# Altium PCB Circuit_Labs_4Layer-85 X 80mm.PcbDoc
Units mil, origin at the board's own origin, x right, y up, seen from the top; angles counter-clockwise.
Board outline 3346.46 x 3149.61 mil, 4 copper layers (Top Layer, Internal Plane 1, Internal Plane 2, Bottom Layer), stack 70.17 mil thick; 124 components, 89 nets, 356 pads, 83 vias.
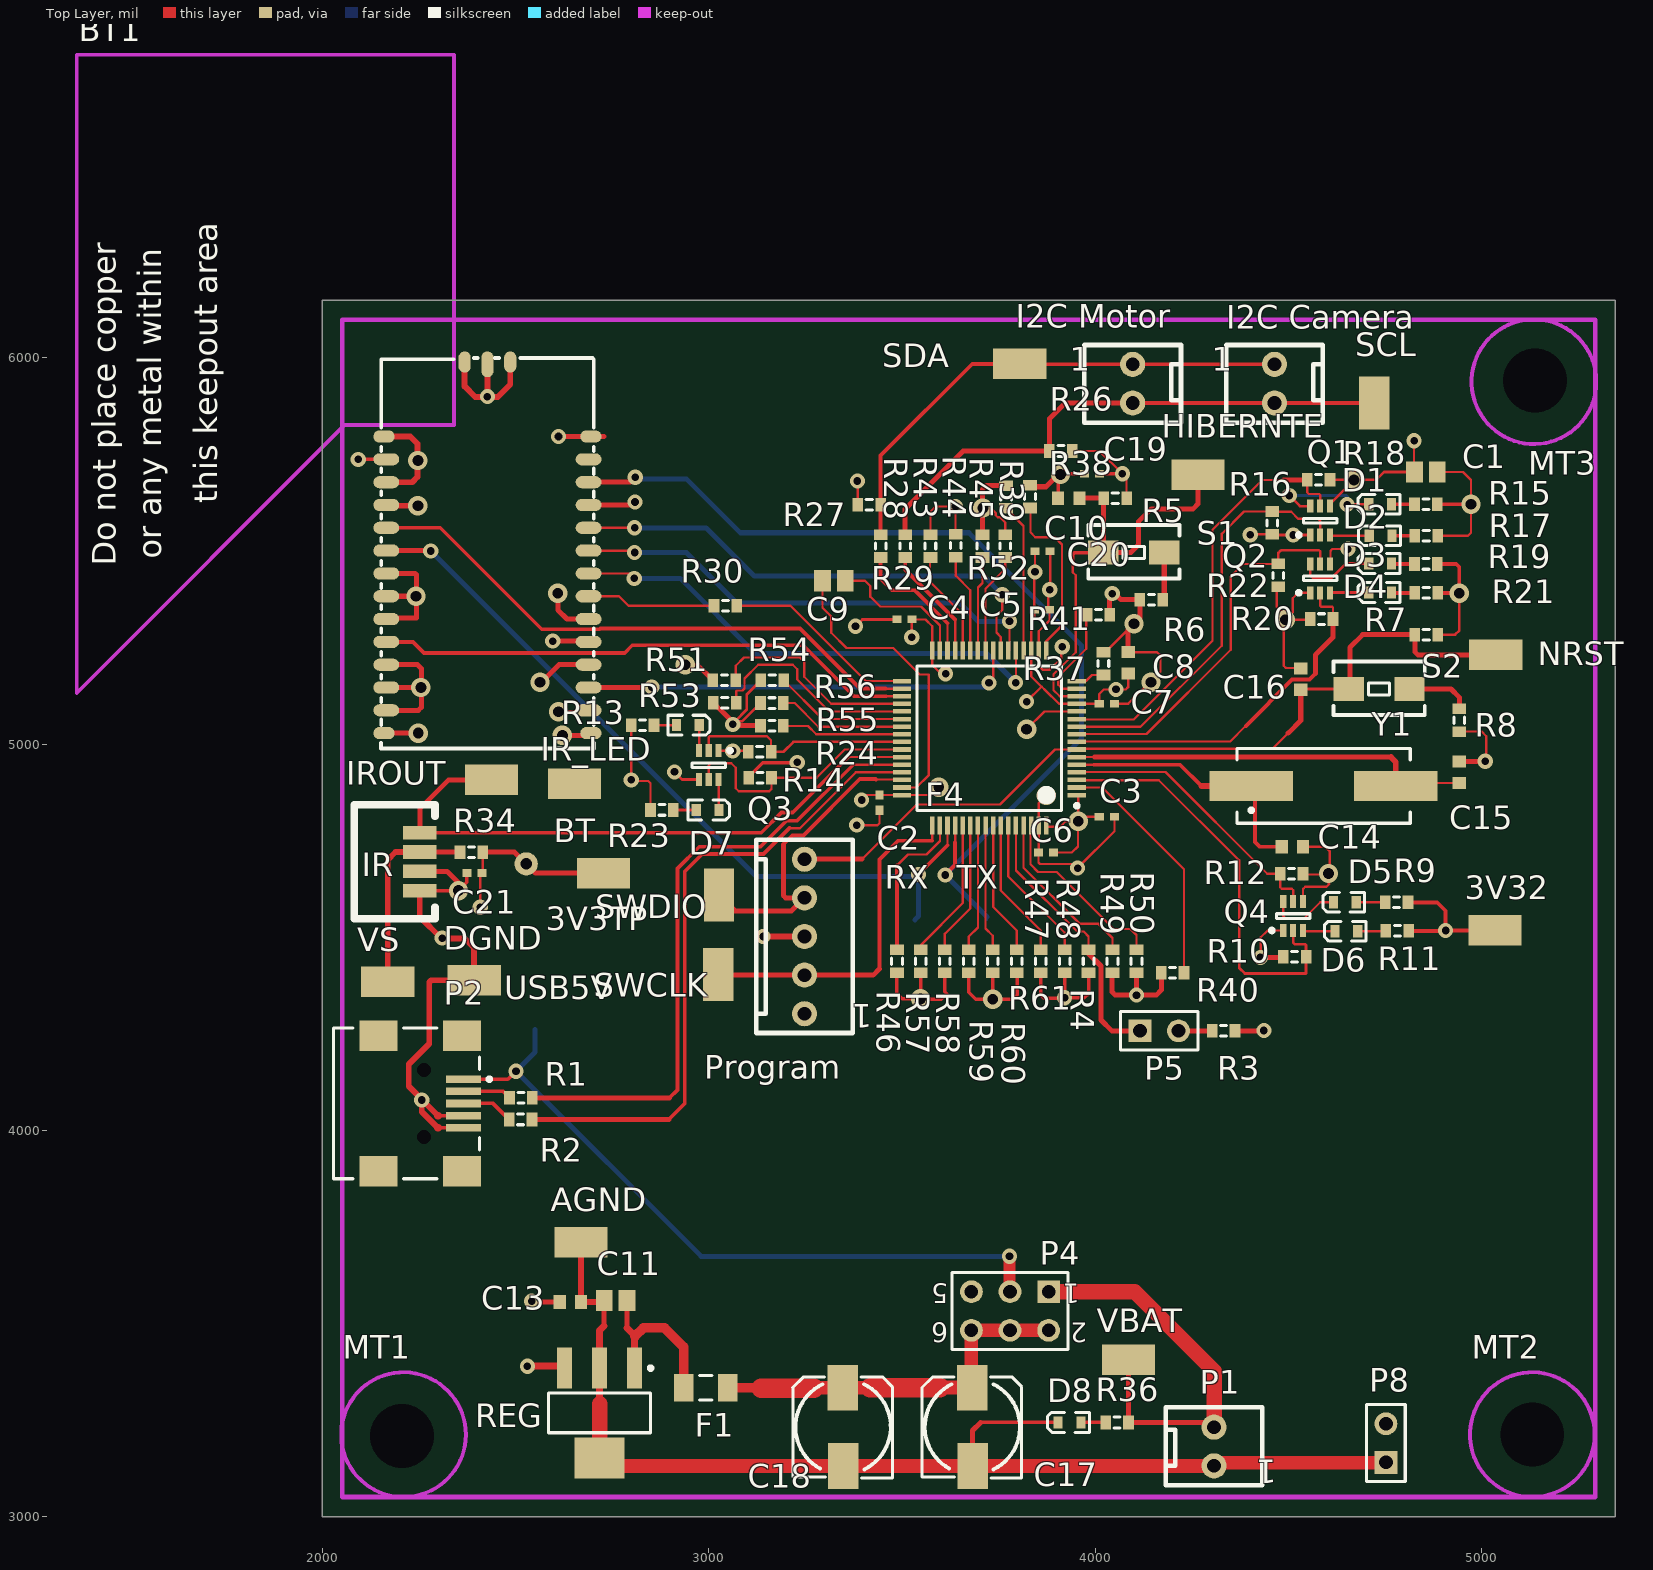
[diagram p0: Top Layer view]
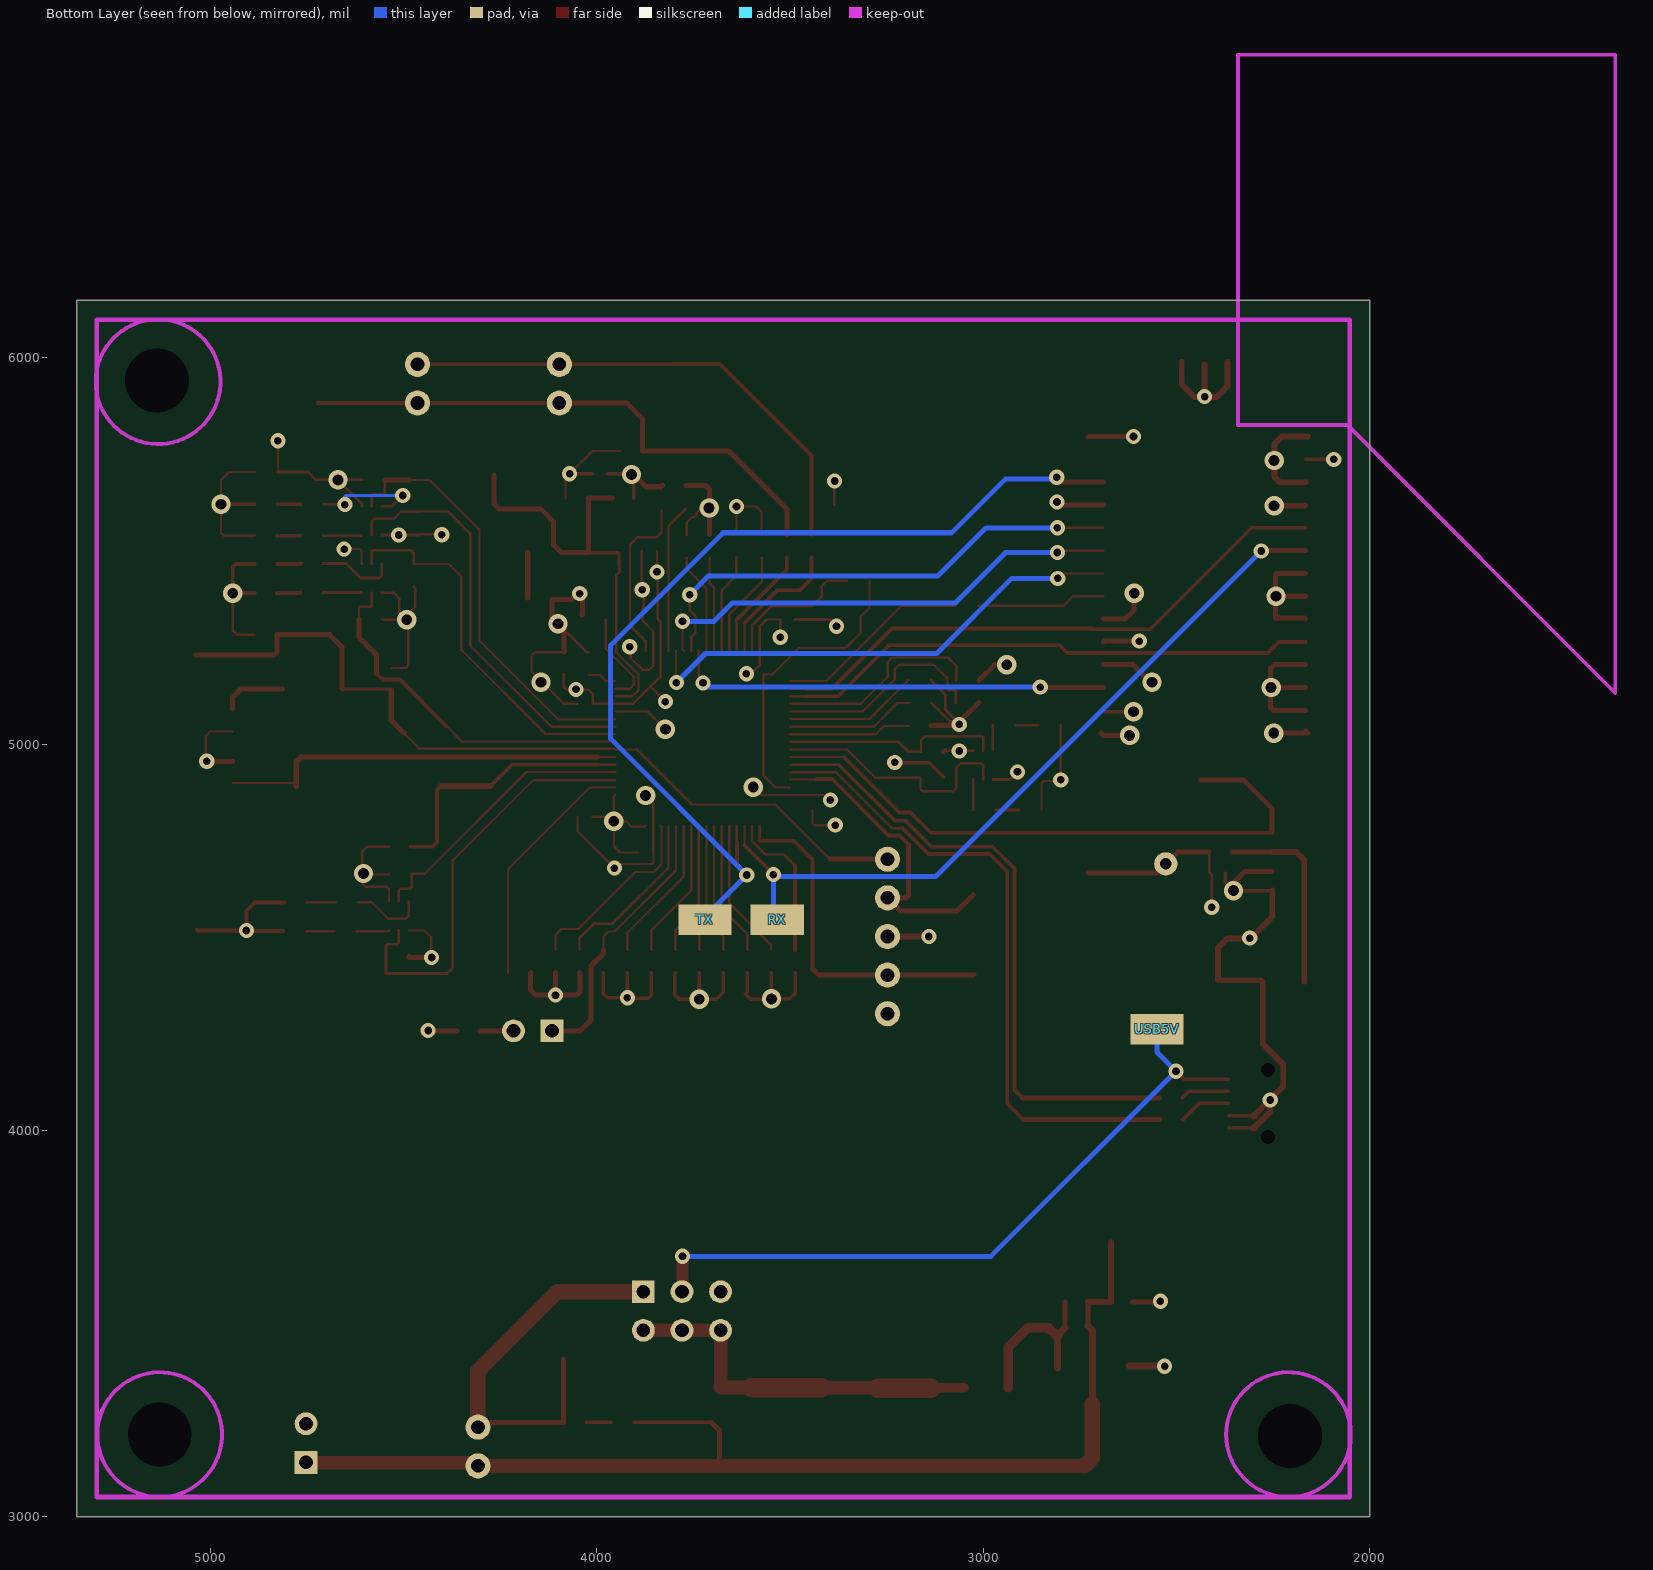
[diagram p1: Bottom Layer view, seen from below]
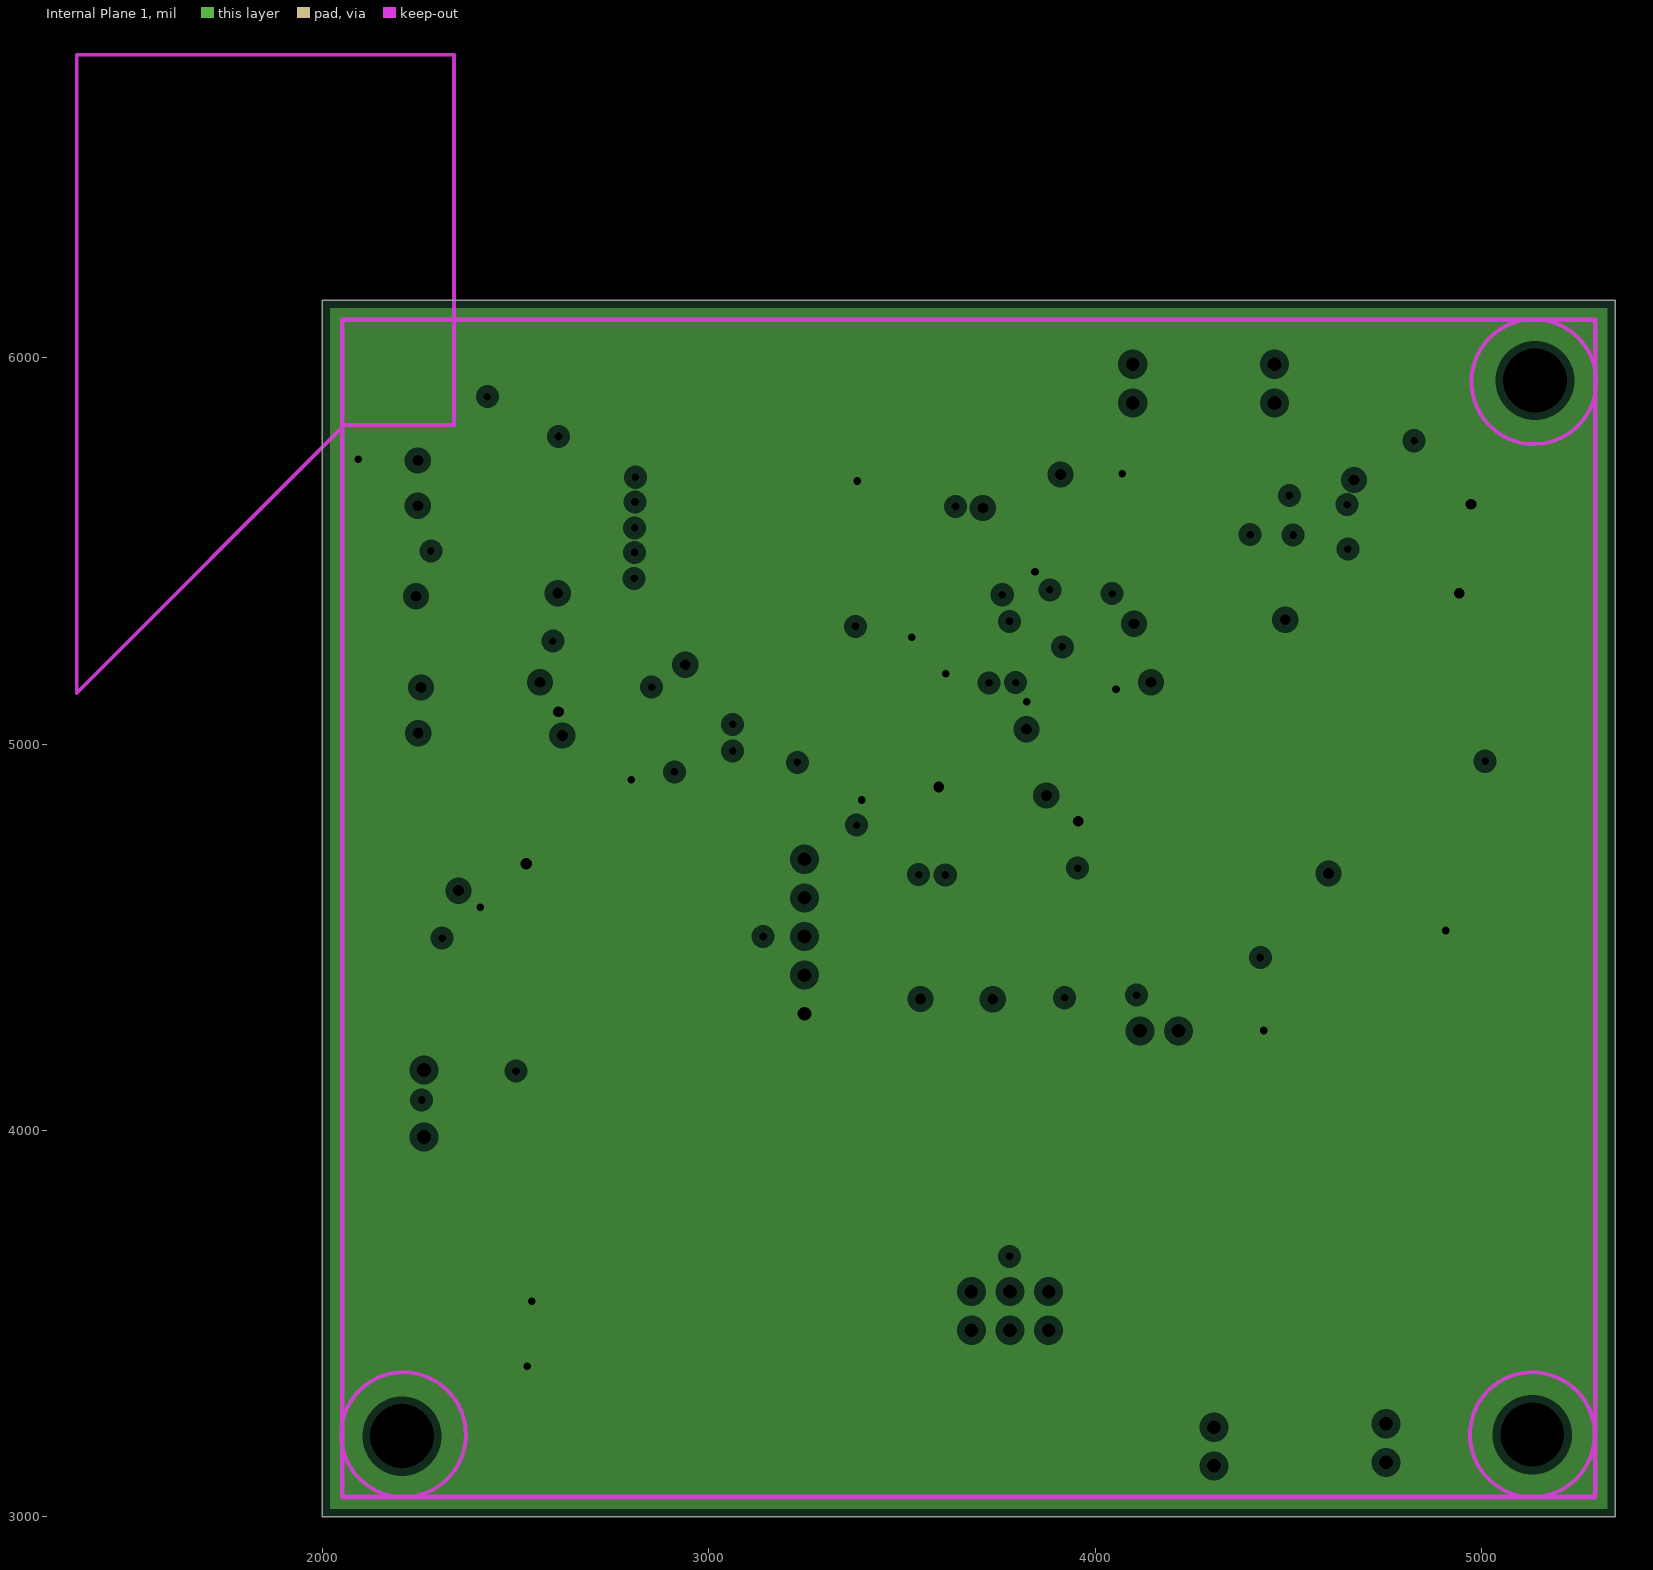
[diagram p2: Internal Plane 1, clearances drawn from the general rule]
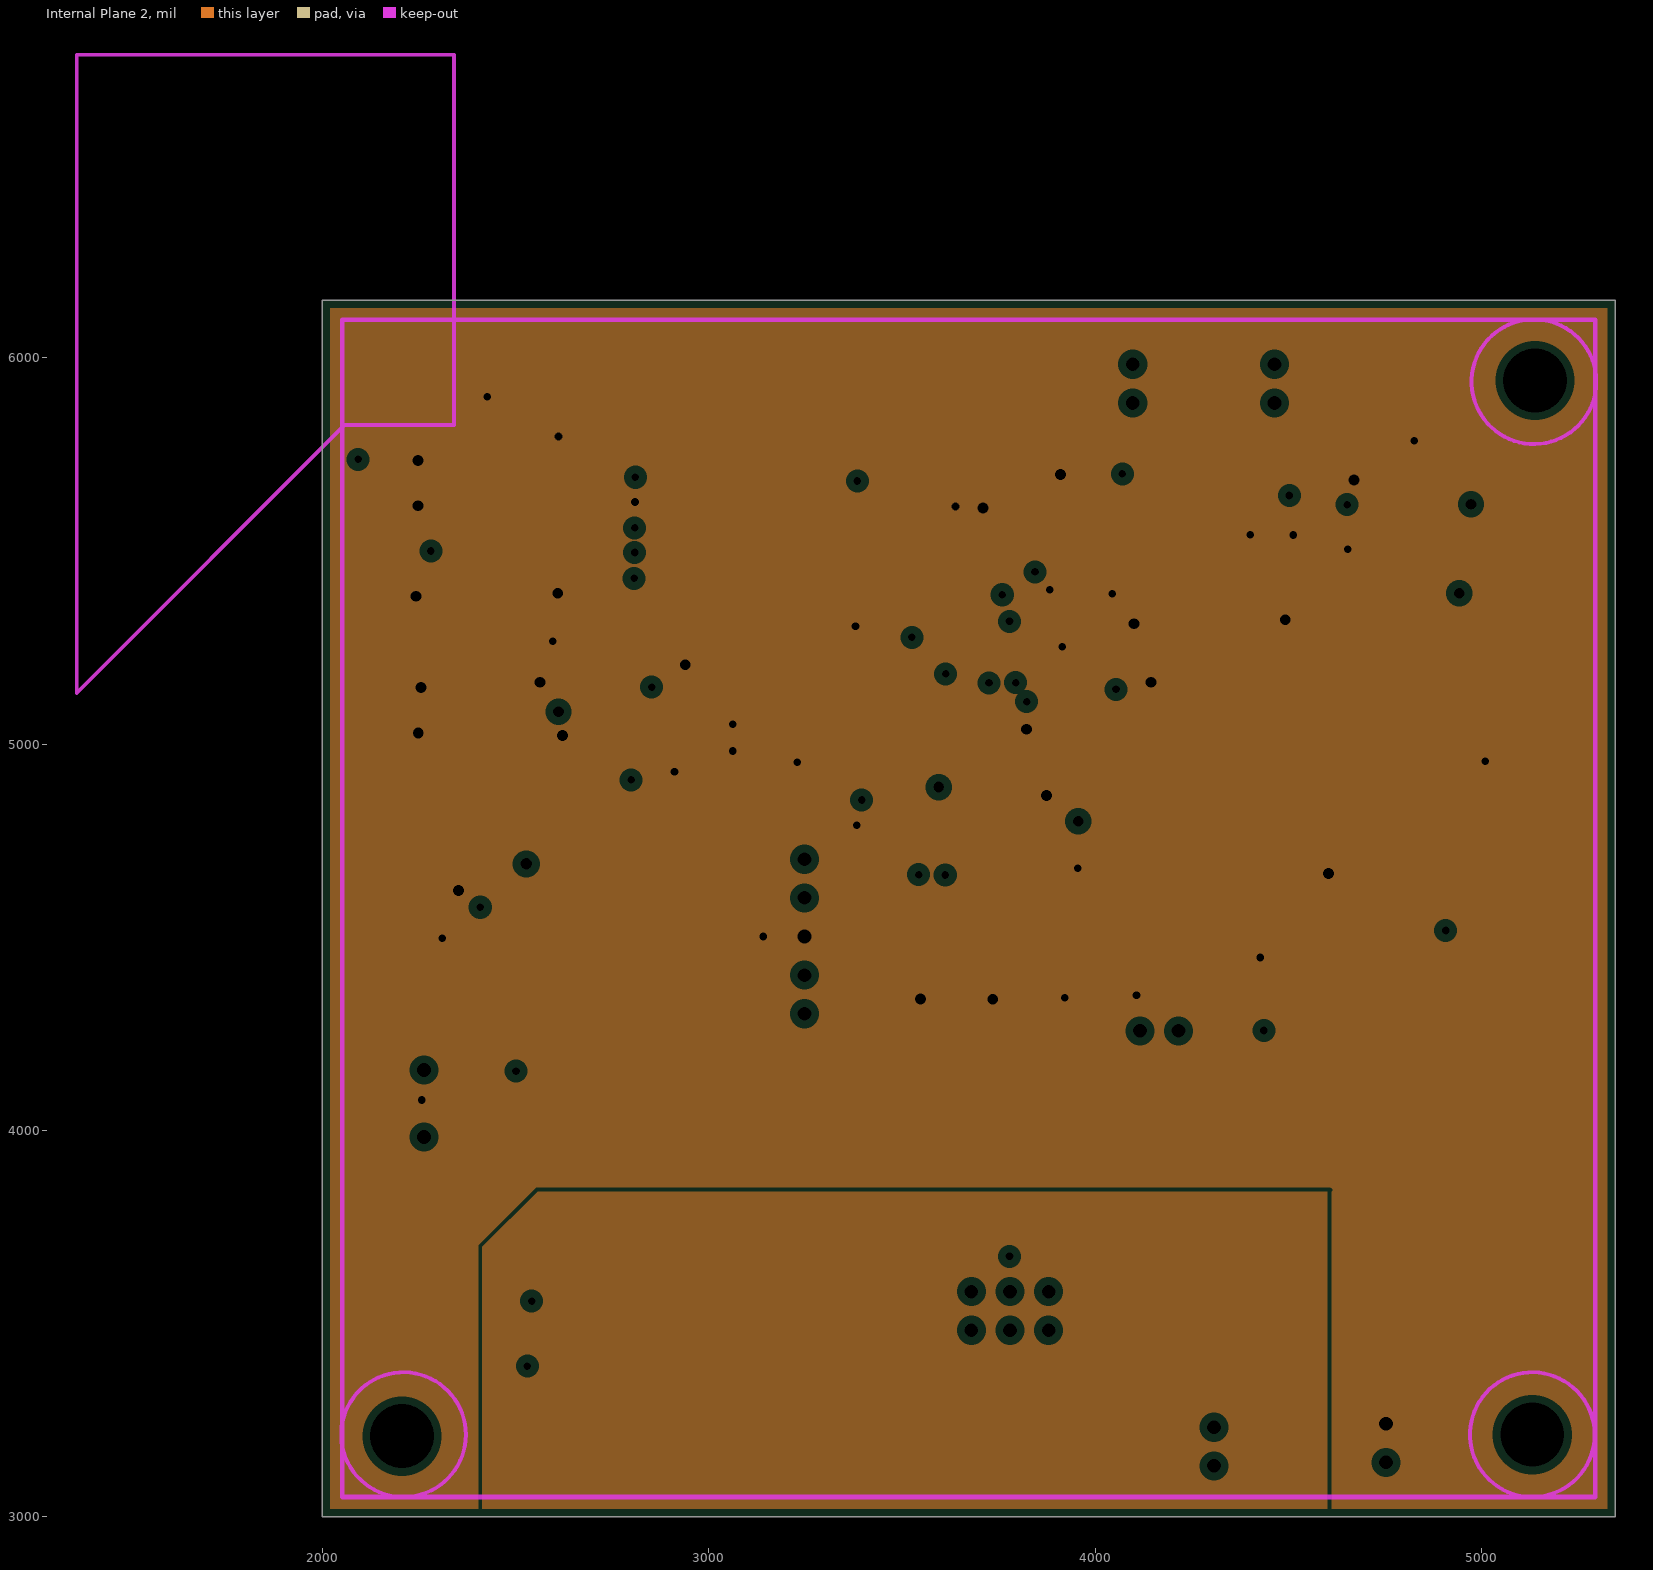
[diagram p3: Internal Plane 2, clearances drawn from the general rule]

## Layer stack, top to bottom
Top Layer: signal copper 1.4
Dielectric: prepreg 12.6, FR-4, Dk 4.8
Internal Plane 1: plane copper 1.4, net 3V3
Dielectric: core 39.3701, FR-4, Dk 4.8
Internal Plane 2: plane copper 1.4, net DGND
Dielectric: prepreg 12.6, FR-4, Dk 4.8
Bottom Layer: signal copper 1.4

## Board outline
2000,3000 5346.46,3000 5346.46,6149.61 2000,6149.61

## Design rules (kind name [scope] priority, off if disabled: settings)
Clearance [All] p1: gap=5.91
HoleSize [All] p1: absolutevalues=TRUE maxlimit=196.85 minlimit=11.81 maxpercent=80.000 minpercent=20.000
MinimumAnnularRing [All] p1: minimumring=3.94
MinimumSolderMaskSliver [All] p1: minsoldermaskwidth=3.94
PasteMaskExpansion [All] p1: expansion=7.87
PlaneClearance [All] p1: clearance=20
PlaneConnect [All] p1: planeconnectstyle=Relief reliefexpansion=20 reliefentries=4 reliefconductorwidth=10 reliefairgap=10
PolygonConnect [All] p1: connectstyle=Relief reliefconductorwidth=10 reliefentries=4 polygonreliefangle="90 Angle" airgapwidth=10
RoutingVias [All] p1: holewidth=23.62 width=47.24 viastyle="Through Hole" minholewidth=23.62 minwidth=50 maxholewidth=27.56 maxwidth=55.12
SMDNeckDown [All] p1: percent=50.000
SMDToCorner [All] p1: distance=78740
SMDToPlane [All] p1: distance=1968504
SilkToSolderMaskClearance SilkscreenOverComponentPads [IsPad] p1: minsilkscreentomaskgap=10 clearancetoexposedcopper=TRUE
SolderMaskExpansion [All] p1: expansion=5.91
Width [All] p1: maxlimit=78.74 minlimit=5.91 preferedwidth=9.84 minimp=50.000000 maximp=50.000000 favimp=50.000000
22 further rules are at their usual default settings.

## Classes and differential pairs
component class Comms: BT1 C19 C20 C21 F4 "I2C Camera" "I2C Motor" IR R26 R27 R28 R29 R30 R34
component class Debug: 3V3TP 3V32 AGND BT D1 D2 D3 D4 D5 D6 D7 DGND HIBERNTE IR_LED IROUT MT1 MT2 MT3 NRST Q1 Q2 Q3 Q4 R9 R10 R11 R12 R13 R14 R15 R16 R17 R18 R19 R20 R21 R22 R23 R24 R37 R38 R39 R40 R41 R43 R44 R45 R46 R47 R48 R49 R50 R51 R52 R53 R54 R55 R56 R57 R58 R59 R60 R61 RX SCL SDA SWCLK SWDIO TX USB5V VBAT VS
component class Micro: C1 C2 C3 C4 C5 C6 C7 C8 C9 C10 C11 C13 C14 C15 C16 C17 C18 D8 F1 P1 P2 P4 P5 P8 Program R1 R2 R3 R4 R5 R6 R7 R8 R36 REG S1 S2 Y1

## Components (designator, comment, footprint, x,y, rotation, side; value= is the part's Value field where it differs from the comment)
3V3TP "3V3" TEST_POINT_3.5X2MM#1 2727.36,4666.34 r0 top
3V32 "3V3" TEST_POINT_3.5X2MM#1 5035.43,4518.7 r0 top
AGND "GND" TEST_POINT_3.5X2MM#1 2669.29,3710.63 r0 top
BT "BT Reset" TEST_POINT_3.5X2MM#1 2652.56,4897.64 r180 top
BT1 "#NAME?" WT12_Bluetooth 2427.17,4989.17 r90 top
C1 "4.7uF" CAPC2012L 4856.3,5704.72 r0 top
C2 "100nF" CAPC1005L 3441.93,4848.43 r90 top
C3 "100nF" CAPC1005L 4030.51,4812.01 r180 top
C4 "100nF" CAPC1005L 3506.89,5322.83 r0 top
C5 "100nF" CAPC1005L 3862.2,5348.43 r180 top
C6 "100nF" CAPC1005L 3873.03,4719.49 r0 top
C7 "100nF" CAPC1005L 4030.51,5104.33 r180 top
C8 "1uF" CAPC1608L 4085.63,5210.63 r270 top
C9 "2.2uF" CAPC2012L 3323.82,5423.23 r180 top
C10 "10nF" CAPC1608L 3932.09,5636.81 r0 top
C11 "2.2uF" CAPC2012L 2758.86,3560.04 r180 top
C13 "1uF" CAPC1608L 2641.73,3556.1 r180 top
C14 "10nF" CAPC1608L 4510.83,4734.25 r180 top
C15 "10nF" CAPC1608L 4942.91,4927.17 r270 top
C16 "10nF" CAPC1608L 4532.48,5168.31 r270 top
C17 "100uF/16V" NICH-1 3682.09,3232.28 r90 top
C18 "100uF/16V" NICH-1 3347.44,3232.28 r90 top
C19 "100nF" CAPC1005L 3992.13,5699.8 r180 top
C20 "100nF" CAPC1005L 3864.17,5499.02 r0 top
C21 "100nF" CAPC1005L 2393.7,4666.34 r0 top
D1 "#NAME?" LED0.8X1.6 4738.19,5621.06 r180 top
D2 "#NAME?" LED0.8X1.6 4739.17,5539.37 r180 top
D3 "#NAME?" LED0.8X1.6 4738.19,5467.52 r180 top
D4 "#NAME?" LED0.8X1.6 4738.19,5392.72 r180 top
D5 "#NAME?" LED0.8X1.6 4646.65,4590.55 r180 top
D6 "#NAME?" LED0.8X1.6 4650.59,4515.75 r180 top
D7 "#NAME?" LED0.8X1.6 2997.05,4829.72 r0 top
D8 "#NAME?" LED0.8X1.6 3934.05,3244.09 r180 top
DGND "GND" TEST_POINT_3.5X2MM#1 2392.72,4388.78 r180 top
F1 "1A" RESC3216N 2992.13,3333.66 r180 top
F4 "STM32F405RGT6" TQFP64_V 3726.38,5015.75 r180 top
HIBERNTE "MCU Hibernate" TEST_POINT_3.5X2MM#1 4266.73,5696.85 r180 top
"I2C Camera" "2 Pin Molex KK HDR" MOLEX_KK_2_HDR 4464.57,5983.27 r270 top
"I2C Motor" "2 Pin Molex KK HDR" MOLEX_KK_2_HDR 4097.44,5983.27 r270 top
IR "IR_Receiver" IR 2291.34,4548.23 r90 top
IR_LED "#NAME?" LED0.8X1.6 2945.87,5049.21 r0 top
IROUT "IR_OUT" TEST_POINT_3.5X2MM#1 2437.99,4907.48 r180 top
MT1 "M4.2 NPTH" MNT-HOLE_4.2mm_NPTH#1 2209.84,3212.6 r0 top
MT2 "M4.2 NPTH" MNT-HOLE_4.2mm_NPTH#2 5131.89,3212.6 r0 top
MT3 "M4.2 NPTH" MNT-HOLE_4.2mm_NPTH#3 5136.1,5938.19 r0 top
NRST "NRST" TEST_POINT_3.5X2MM#1 5037.4,5231.3 r180 top
P1 "2 Pin Molex KK HDR" MOLEX_KK_2_HDR 4308.07,3131.89 r90 top
P2 "JS_USB_MINI_B" USB/SM0.8-6H5 2056.1,4069.88 r180 top
P4 "Header 3X2" HDR2X3 3879.92,3582.68 r180 top
P5 "Header 2" HDR1X2 4116.14,4257.87 r0 top
P8 "Header 2" HDR1X2 4752.95,3140.75 r90 top
Program "5 Pin Molex KK Hdr" MOLEX_KK_5_HDR 3248.03,4302.17 r90 top
Q1 "DUAL-NFET" SOT363-6N 4582.68,5578.74 r90 top
Q2 "DUAL-NFET" SOT363-6N 4582.68,5429.13 r90 top
Q3 "DUAL-NFET" SOT363-6N 3000,4945.87 r270 top
Q4 "DUAL-NFET" SOT363-6N 4512.8,4555.12 r90 top
R1 "22R" RESC1608L 2513.78,4084.65 r180 top
R2 "22R" RESC1608L 2512.8,4028.54 r180 top
R3 "220R" RESC1608L 4332.68,4257.87 r0 top
R4 "22K" RESC1608L 3983.27,4437.99 r90 top
R5 "10K" RESC1608L 4052.17,5636.81 r0 top
R6 "470R" RESC1608L 4145.67,5374.02 r180 top
R7 "10K" RESC1608L 4857.28,5283.46 r0 top
R8 "470R" RESC1608L 4942.91,5062.01 r270 top
R9 "39R" RESC1608L 4780.51,4590.55 r0 top
R10 "1M" RESC1608L 4516.73,4449.8 r0 top
R11 "39R" RESC1608L 4782.48,4516.73 r0 top
R12 "1M" RESC1608L 4508.86,4664.37 r180 top
R13 "39R" RESC1608L 2828.74,5049.21 r180 top
R14 "1M" RESC1608L 3132.87,4913.39 r0 top
R15 "39R" RESC1608L 4856.3,5621.06 r0 top
R16 "1M" RESC1608L 4458.66,5572.83 r90 top
R17 "39R" RESC1608L 4857.28,5539.37 r0 top
R18 "1M" RESC1608L 4578.74,5684.06 r180 top
R19 "39R" RESC1608L 4856.3,5466.54 r0 top
R20 "1M" RESC1608L 4586.61,5323.82 r0 top
R21 "39R" RESC1608L 4857.28,5391.73 r0 top
R22 "1M" RESC1608L 4474.41,5437.01 r90 top
R23 "39R" RESC1608L 2878.94,4829.72 r180 top
R24 "1M" RESC1608L 3131.89,4980.31 r0 top
R26 "4K7" RESC1608L 3911.42,5758.86 r0 top
R27 "4K7" RESC1608L 3415.35,5620.08 r0 top
R28 "100R" RESC1608L 3508.44,5512.8 r90 top
R29 "100R" RESC1608L 3444.88,5512.8 r90 top
R30 "100R" RESC1608L 3043.31,5358.27 r180 top
R34 "100R" RESC1608L 2385.83,4720.47 r180 top
R36 "160R" RESC1608L 4057.09,3244.09 r0 top
R37 "1K" RESC1608L 4021.65,5208.66 r270 top
R38 "1K" RESC1608L 3831.69,5640.75 r270 top
R39 "1K" RESC1608L 3769.68,5639.76 r270 top
R40 "1K" RESC1608L 4200.79,4408.46 r0 top
R41 "1K" RESC1608L 4008.86,5334.65 r180 top
R43 "1K" RESC1608L 3573.82,5512.8 r270 top
R44 "1K" RESC1608L 3639.76,5513.78 r270 top
R45 "1K" RESC1608L 3708.66,5512.8 r270 top
R46 "1K" RESC1608L 3487.2,4437.99 r90 top
R47 "1K" RESC1608L 3859.25,4437.99 r270 top
R48 "1K" RESC1608L 3921.26,4437.99 r270 top
R49 "1K" RESC1608L 4045.27,4437.99 r270 top
R50 "1K" RESC1608L 4107.28,4437.99 r270 top
R51 "1K" RESC1608L 3040.35,5165.35 r0 top
R52 "1K" RESC1608L 3767.72,5512.8 r270 top
R53 "1K" RESC1608L 3041.34,5107.28 r0 top
R54 "1K" RESC1608L 3164.37,5165.35 r0 top
R55 "1K" RESC1608L 3163.39,5106.3 r0 top
R56 "1K" RESC1608L 3163.39,5047.24 r0 top
R57 "1K" RESC1608L 3549.21,4437.99 r90 top
R58 "1K" RESC1608L 3611.22,4437.99 r90 top
R59 "1K" RESC1608L 3673.23,4437.99 r90 top
R60 "1K" RESC1608L 3735.24,4437.99 r90 top
R61 "1K" RESC1608L 3797.24,4437.99 r90 top
REG "LT1963" SOT223-4M 2717.52,3268.7 r270 top
RX "UARTRX" TEST_POINT_3.5X2MM#2 3533.46,4545.28 r0 top
S1 "EVQPNF05M" EVQPNF05M 4100.39,5496.06 r0 top
S2 "EVQPNF05M" EVQPNF05M 4735.24,5142.72 r0 top
SCL "I2C2SCL" TEST_POINT_3.5X2MM#1 4722.44,5882.87 r90 top
SDA "I2C2SDA" TEST_POINT_3.5X2MM#1 3805.12,5984.25 r0 top
SWCLK "SWCLK" TEST_POINT_3.5X2MM#1 3024.61,4403.54 r90 top
SWDIO "SWDIO" TEST_POINT_3.5X2MM#1 3026.57,4609.25 r90 top
TX "UARTTX" TEST_POINT_3.5X2MM#2 3720.47,4545.28 r0 top
USB5V "Vusb" TEST_POINT_3.5X2MM#2 2550.2,4261.81 r180 top
VBAT "Vbat" TEST_POINT_3.5X2MM#1 4086.61,3406.5 r180 top
VS "Vs" TEST_POINT_3.5X2MM#1 2169.29,4384.84 r180 top
Y1 "8MHz" HC49/4h_SMX 4591.54,4891.73 r0 top

## Footprints (in the part's own frame and the unit in brackets; to place one, negate y for a bottom-side part, rotate by r counter-clockwise, add the part's x,y. Pads: shape width x height; smd on the part's side, far side on the other; paste and mask are expansions set on the pad)
CAPC1005L [mm] "Chip Capacitor, Body 1.0x0.5mm, IPC High Density"
  rect 0.6x0.5 smd: 1(-0.5,0) 2(0.5,0)
  body extent -0.55,-0.3 0.55,0.3, height 0.6
CAPC1608L [mm] "Chip Capacitor, Body 1.6x0.8mm, IPC High Density"
  rect 0.8x0.9 smd: 1(-0.7,0) 2(0.7,0)
  body extent -0.87,-0.48 0.87,0.48, height 0.85
CAPC2012L [mm] "Chip Capacitor, Body 2.0x1.3mm, IPC High Density"
  rect 1.1x1.4 smd: 1(-0.75,0) 2(0.75,0)
  body extent -1.1,-0.72 1.1,0.72, height 1.1
EVQPNF05M [mm] "Panansonic light touch SMD push button switch"
  rect 2x1.6 smd: 1(-2,0) 2(2,0)
  silkscreen extent -3,-1.7 3,1.8, body extent -3,-1.7 3,1.8, height 5
HC49/4h_SMX [mm] "Quartz Crystal, SM; Body 13.4 (inc. leads) x 4.9 mm (LxW max)"
  rect 5.5x2 smd: 1(-4.75,0) 2(4.75,0)
  silkscreen extent -5.7,-2.45 5.7,2.45, body extent -5.61,-2.35 5.56,2.35, height 4
HDR1X2 [mm] "Connector; Header; 2 Position"
  rect 1.5x1.5 hole 0.9: 1(0,0)
  round 1.5 hole 0.9: 2(2.54,0)
  silkscreen extent -1.27,-1.27 3.81,1.27
HDR2X3 [mm] "Connector; Header; 3x2 Position"
  rect 1.5x1.5 hole 0.9: 1(0,0)
  round 1.5 hole 0.9: 2(0,2.54) 3(2.54,0) 4(2.54,2.54) 5(5.08,0) 6(5.08,2.54)
  silkscreen extent -1.27,-1.27 6.35,3.81
IR [mm] "IR footprint"
  rect 0.9x2.2 smd: 1(1.845,1) 2(3.115,1) 3(4.385,1) 4(5.655,1)
  silkscreen extent 0,0 7.5,5.3
LED0.8X1.6 [mm] "LED 0603"
  rect 0.6x0.8 smd: 1(-0.75,0) 2(0.75,0)
  silkscreen extent -1.3,-0.65 1.45,0.65
MNT-HOLE_4.2mm_NPTH#1 [mm] "Mounting Hole 4.2mm non plated"
  round 0 hole 4.2 unplated: 1(-0.1,-0.1)
  Keep-Out Layer circle w0.254: c0,0 r4.1
MNT-HOLE_4.2mm_NPTH#2 [mm] "Mounting Hole 4.2mm non plated"
  round 0 hole 4.2 unplated: 1(0,0)
  Keep-Out Layer circle w0.254: c0,0 r4.1
MNT-HOLE_4.2mm_NPTH#3 [mm] "Mounting Hole 4.2mm non plated"
  round 0 hole 4.2 unplated: 1(0.075,0.08)
  Keep-Out Layer circle w0.254: c0,0 r4.1
MOLEX_KK_2_HDR [mil] "MOLEX_KK_2_HDR"
  round 65 hole 35.43: 1(0,0) 2(100,0)
  silkscreen extent -50,-125 152,125, body extent -44,-121 146,119, height 630
MOLEX_KK_5_HDR [mil] "MOLEX_KK_5_HDR"
  round 65 hole 35.43: 1(0,0) 2(100,0) 3(200,0) 4(300,0) 5(400,0)
  silkscreen extent -50,-125 450,125, body extent -44,-118 444,118, height 630
NICH-1 [mm] "Electrolytic capacitor"
  rect 3x2 smd: 1(-2.561,-0.022) 2(2.584,0.011)
  silkscreen extent -3.34,-3.25 3.3,3.3, body extent -3.2,-3.21 3.2,3.2, height 5.3
RESC1608L [mm] "Chip Resistor, Body 1.6x0.8mm, IPC High Density"
  rect 0.7x0.9 smd: 1(-0.75,0) 2(0.75,0)
  silkscreen extent -0.2,-0.35 0.2,0.35, body extent -0.85,-0.48 0.85,0.48, height 0.9
RESC3216N [mm] "Chip Resistor, Body 3.2x1.6mm, IPC Medium Density"
  rect 1.3x1.8 smd: 1(-1.45,0) 2(1.45,0)
  silkscreen extent -0.4,-0.8 0.4,0.8, body extent -1.68,-0.87 1.68,0.87, height 0.71
SOT223-4M [mm] "SOT223, 4-Leads, Body 6.5x3.5mm, Pitch 2.3mm, Lead Span 7mm, IPC Low Density"
  rect 2.7x1 smd: 1(-2.95,2.3) 2(-2.95,0) 3(-2.95,-2.3)
  rect 2.7x3.3 smd: 4(2.95,0)
  silkscreen extent -3.07,-3.35 1.3,3.48, body extent -1.85,-3.35 1.85,3.35, height 1.8
SOT363-6N [mm] "SOT363, 6-Leads, Body 2x1.3mm, Pitch 0.65mm, Lead Span 2.1mm, IPC Medium Density"
  rect 0.85x0.4 smd: 1(-0.95,0.65) 2(-0.95,0) 3(-0.95,-0.65) 4(0.95,-0.65) 5(0.95,0) 6(0.95,0.65)
  silkscreen extent -1.07,-1.1 0.15,1.52, body extent -0.7,-1.1 0.7,1.1, height 1
TEST_POINT_3.5X2MM#1 [mm] "Test Point Pad"
  rect 3.5x2 smd: 1(0,0)
  body extent -1.75,-1.01 1.75,1, height 2
TEST_POINT_3.5X2MM#2 [mm] "Test Point Pad"
  rect 3.5x2 smd far side: 1(0,0)
  body extent -1.75,-1.01 1.75,1, height 2
TQFP64_V [mm] "Thin QFP, 64-Leads, Body 10x10mm, Pitch 0.5mm, ST Recommended"
  rect 1.2x0.3 smd: 1(-5.75,3.75) 2(-5.75,3.25) 3(-5.75,2.75) 4(-5.75,2.25) 5(-5.75,1.75) 6(-5.75,1.25) 7(-5.75,0.75) 8(-5.75,0.25) 9(-5.75,-0.25) 10(-5.75,-0.75) 11(-5.75,-1.25) 12(-5.75,-1.75) 13(-5.75,-2.25) 14(-5.75,-2.75) 15(-5.75,-3.25) 16(-5.75,-3.75) 33(5.75,-3.75) 34(5.75,-3.25) 35(5.75,-2.75) 36(5.75,-2.25) 37(5.75,-1.75) 38(5.75,-1.25) 39(5.75,-0.75) 40(5.75,-0.25) 41(5.75,0.25) 42(5.75,0.75) 43(5.75,1.25) 44(5.75,1.75) 45(5.75,2.25) 46(5.75,2.75) 47(5.75,3.25) 48(5.75,3.75)
  rect 0.3x1.2 smd: 17(-3.75,-5.75) 18(-3.25,-5.75) 19(-2.75,-5.75) 20(-2.25,-5.75) 21(-1.75,-5.75) 22(-1.25,-5.75) 23(-0.75,-5.75) 24(-0.25,-5.75) 25(0.25,-5.75) 26(0.75,-5.75) 27(1.25,-5.75) 28(1.75,-5.75) 29(2.25,-5.75) 30(2.75,-5.75) 31(3.25,-5.75) 32(3.75,-5.75) 49(3.75,5.75) 50(3.25,5.75) 51(2.75,5.75) 52(2.25,5.75) 53(1.75,5.75) 54(1.25,5.75) 55(0.75,5.75) 56(0.25,5.75) 57(-0.25,5.75) 58(-0.75,5.75) 59(-1.25,5.75) 60(-1.75,5.75) 61(-2.25,5.75) 62(-2.75,5.75) 63(-3.25,5.75) 64(-3.75,5.75)
  silkscreen extent -5.87,-4.75 4.75,4.75, body extent -5,-5 5,5, height 1.6
USB/SM0.8-6H5 [mm] "Connector; USB2.0, Type B, SM; 5 Position; Right Angle"
  rect 2.3x0.5 smd: 1(-7.85,-1.6) 2(-7.85,-0.8) 3(-7.85,0) 4(-7.85,0.8) 5(-7.85,1.6)
  rect 2.5x2 smd: 6(-7.75,4.45) 7(-2.25,4.45) 8(-7.75,-4.45) 9(-2.25,-4.45)
  round 0.6 hole 0.9 unplated: MH1(-5.25,2.2) MH2(-5.25,-2.2)
  silkscreen extent -9.68,-4.95 0.7,4.95, body extent -8.9,-4.95 0.7,4.95, height 3.9
WT12_Bluetooth [mm] "WT12 Bluetooth Module"
  oval 0.8x1.4 smd: 1(20.5,6.8) 14(1,6.8) 15(1,-6.8) 28(20.5,-6.8)
  oval 0.8x1.7 smd: 2(19,6.65) 3(17.5,6.65) 4(16,6.65) 5(14.5,6.65) 6(13,6.65) 7(11.5,6.65) 8(10,6.65) 9(8.5,6.65) 10(7,6.65) 11(5.5,6.65) 12(4,6.65) 13(2.5,6.65) 16(2.5,-6.65) 17(4,-6.65) 18(5.5,-6.65) 19(7,-6.65) 20(8.5,-6.65) 21(10,-6.65) 22(11.5,-6.65) 23(13,-6.65) 24(14.5,-6.65) 25(16,-6.65) 26(17.5,-6.65) 27(19,-6.65)
  oval 1.4x0.8 smd: 29(25.4,-1.5) 31(25.4,1.5)
  oval 1.7x0.8 smd: 30(25.25,0)
  Keep-Out Layer lines w0.254: 21.25,6.95 21.25,2.2 45.6,2.2 45.6,27 28.75,27 17,27 3.65,27 21.25,9.4 21.25,6.65
  silkscreen extent 0,-7 25.65,7, body extent 0,-7 25.5,7, height 2.4

## Part data
3V3TP 3V32 AGND BT DGND HIBERNTE IROUT NRST RX SCL SDA SWCLK SWDIO TX USB5V VBAT VS: library part TP_TESTPOINT, "Test-Point SMD"
BT1: library part UN_WT12_Bluetooth, "BLUEGIGA - WT12-A-AI - BLUETOOTH MOD, V2.1, CLASS 2, 3MBPS"
C1: library part CC_4.7uF_0805, "CAP CER 4.7uF Y5V -20% +80% 16V 0805"
C2 C3 C4 C5 C6 C7 C19 C20 C21: library part CC_100nF_0402, "CAP CER 100nF X7R +-10% 16V 0402"
C8 C13: library part CC_1uF_0603, "CAP CER 1uF Y5V -20% +80% 16V 0603"
C9 C11: library part CC_2.2uF_0805, "CAP CER 2.2uF Y5V -20% +80% 25V 0805"
C10 C14 C15 C16: library part CC_10nF_0603, "CAP CER 10nF X7R +-10% 50V 0603"
C17 C18: library part CA_100uF_16V_SMD, "Nichcon WX series  SMT Aluminium Electrolytic Cap"
D1 D2 D5 D8: library part DL_TLMG1100, "LED Green 0603"
D3 D4 IR_LED: library part DL_TLMS1100, "LED Red 0603"
D6: library part DL_TLMY1100, "LED Yellow 0603"
D7: library part DL_TLMB1100, "LED Blue 0603"
F1: library part FS_Fuse_1.0A_SMD_1206, "Fuse 1.0A Very Fast Acting 1206"
F4: "ARM Cortex-M4 32b MCU+FPU, 210DMIP, 1024 kB Flash, 192+4 kB RAM, 51 I/Os, 64-pin LQFP, -40 to +85°C, Tray"
"I2C Camera" "I2C Motor" P1: library part JA_MOLEX_KK_2POS, "CONN HEADER 2POS 2.54mm VERT_Thru Hole"
MT1 MT2 MT3: library part MC_M4.2_HOLE_NPT, "Fixing M4.2 Mount Hole NPTH"
P2: library part JS_USB_MINI_B_SMT, "USB 2.0, Right Angle, SMT, B Type, Receptacle, 5 Position,"
P4: "Header, 3-Pin, Dual row"
P5 P8: "Header, 2-Pin"
Program: library part JA_MOLEX_KK_5POS, "CONN HEADER 5POS 2.54mm VERT_Thru Hole"
R1 R2: library part RS_22R, "RES 22 OHM 1/10W 5% 0603 SMD"
R3: library part RS_220R, "RES 220 OHM 1/10W 5% 0603 SMD"
R4: library part RS_22K, "RES 22.0K OHM 1/10W 5% 0603 SMD"
R5 R7: library part RS_10K, "RES 10.0K OHM 1/10W 5% 0603 SMD"
R6 R8: library part RS_470R, "RES 470 OHM 1/10W 5% 0603 SMD"
R9 R11 R13 R15 R17 R19 R21 R23: library part RS_39R, "RES 39 OHM 1/10W 5% 0603 SMD"
R10 R12 R14 R16 R18 R20 R22 R24: library part RS_1M, "RES 1.0M OHM 1/10W 5% 0603 SMD"
R26 R27: library part RS_4K7, "RES 4.7K OHM 1/10W 5% 0603 SMD"
R28 R29 R30 R34: library part RS_100R, "RES 100 OHM 1/10W 5% 0603 SMD"
R36: library part RS_160R, "RES 160 OHM 1/10W 5% 0603 SMD"
R37 R38 R39 R40 R41 R43 R44 R45 R46 R47 R48 R49 R50 R51 R52 R53 R54 R55 R56 R57 R58 R59 R60 R61: library part RS_1K, "RES 1.0K OHM 1/10W 5% 0603 SMD"
S1 S2: library part WS_EVQPNF05M, "Panasonic 6 x 3.5mm SMD Light Touch Switch Type"
Y1: library part XT_8MHz_HC49/4H, "CRYSTAL 8.00 MHZ 18PF SMD"

## Free pads (board coordinates)
  round 60 hole 30: 1(2527.56,4689.96)

## Via types
v1: diameter 39.37, hole 19.68, Top Layer to Bottom Layer, 56 vias
v2: diameter 50, hole 28, Top Layer to Bottom Layer, 26 vias
v3: diameter 39.37, hole 19.68, Top Layer to Bottom Layer, tented bottom, 1 vias

## Nets (pads, with @x,y where several pads share a name; then routed paths per layer and width w, separated by ;. In a path a pad name is that pad's centre, name@x,y a point inside that pad or via, vN(x,y) a via of type N, cw(c..) or ccw(c..) an arc to the next point about the centre after c; other vN are vias at no path point)
3V3: 3V3TP.1 3V32.1 BT1.2 BT1.16 C1.2 C2.2 C3.2 C4.2 C5.2 C6.2 C7.2 C8.2 C13.2 C19.1 C20.1 C21.2 F4.1 F4.13 F4.19 F4.32 F4.48 F4.64 pad.1 Program.1 R3.2 R5.2 R7.2 R9.2 R11.2 R13.2 R15.2 R17.2 R19.2 R21.2 R23.2 R26.2 R27.1 R34.1 REG.3 | length 4161
  Top Layer w5.91: v1(2408.46,4577.76) 2408.46,4661.42 C21.2 2415.35,4668.31 R34.1 ; v1(2541.34,3558.07) v1@2543.31,3556.1 ; R13.2 v1(2799.21,4907.48) 2802.17,4904.53 2843.5,4904.53 2849.41,4898.62 R23.2 ; v1(3384.84,5681.1) 3385.83,5680.12 R27.1 ; v1(3395.67,4855.31) 3408.47,4868.11 C2.2 F4.48 3574.8,4868.11 v2(3595.47,4888.78) ; v1(3525.59,5276.57) 3525.59,5321.85 C4.2 3561.02,5322.83 3578.74,5305.12 3578.74,5290.35 F4.32 3578.74,5204.72 3601.38,5182.09 v1(3613.19,5182.09) ; v1(3822.83,5110.24) 3861.22,5148.62 ; C20.1 v1(3844.49,5445.87) 3842.52,5443.9 C5.2 3842.52,5323.82 3834.64,5315.94 F4.19 3834.64,5175.2 3861.22,5148.62 ; F4.64 3876.97,4786.42 3910.43,4786.42 3924.21,4800.2 v2(3956.69,4800.2) ; C6.2 3939.96,4719.49 3955.71,4735.24 3955.71,4799.21 v2(3956.69,4800.2) ; R26.2 4011.81,5758.86 v1(4070.87,5699.8) 4081.69,5688.98 R5.2 ; F4.1 3956.69,4864.18 v2(3956.69,4800.2) ; C3.2 3968.5,4812.01 v2(3956.69,4800.2) ; C8.2 4085.63,5147.64 4079.72,5141.73 4022.64,5141.73 4010.83,5129.92 C7.2 F4.13 3906.5,5104.33 3872.05,5138.78 3862.2,5148.62 3861.22,5148.62 ; v1@4436.02,4257.87 v1(4437.01,4258.86) ; R17.2@4885.83,5540.36 R17.2 4965.55,5539.37 4973.42,5547.24 v2(4973.42,5621.06) ; C1.2 4952.76,5704.72 4973.43,5684.06 v2(4973.42,5621.06)
  Top Layer w7: R7.2 4932.09,5283.47 4942.91,5294.29 v2(4942.91,5390.75) v2@4941.93,5391.73
  Top Layer w9: v1(2092.52,5737.2) BT1.2 ; v2(2611.22,5083.66) 2685.04,5083.66 BT1.16 ; C19.1 v1(4070.87,5699.8)
  Top Layer w10: R9.2 4885.83,4590.55 4907.48,4568.9 v1(4907.48,4517.72) 5034.45,4517.72 3V32.1 ; R11.2 v1@4906.5,4516.73 ; R19.2 4935.04,5466.54 4942.91,5458.66 4942.91,5392.72 4941.93,5391.73 R21.2 ; R15.2 v2(4973.42,5621.06)
  Top Layer w13: R34.1 2497.05,4720.47 2551.18,4666.34 3V3TP.1 ; v1@2543.31,3556.1 C13.2 ; R3.2 v1@4436.02,4257.87
  Top Layer w18: v1(2530.51,3389.76) REG.3@2622.05,3389.76
  other v1: 4054.13,5141.73
AGND: AGND.1 C11.2 C13.1 C17.1 C18.1 D8.2 P1.1 P8.1 REG.2 REG.4 | length 2994.5
  Top Layer w9: 3703.74,3244.09 D8.2
  Top Layer w13: 2729.33,3494.09 C11.2@2729.33,3556.1 ; C17.1 3682.96,3223.31 3703.74,3244.09
  Top Layer w15: AGND.1 C13.1 C11.2@2729.33,3556.1
  Top Layer w18: 2717.52,3292.32 REG.2 2717.52,3482.28 2729.33,3494.09
  Top Layer w35: REG.4@2738.63,3131.45 C18.1 C17.1 4303.69,3131.45 4312.01,3139.76 4751.97,3139.76 P8.1
  Top Layer w40: 2717.52,3292.32 REG.4 REG.4@2738.63,3131.45 ; P1.1@4312.01,3139.76 P1.1@4312.99,3140.75
BOOT0: F4.60 P5.1 R4.2 | length 716.9
  Top Layer w5.91: F4.60 3795.27,4673.23 3953.74,4514.76 3970.47,4514.76 3983.27,4501.97 R4.2
  Top Layer w13: R4.2 3983.27,4457.68 4015.15,4425.79 4015.15,4286.03 4043.31,4257.87 P5.1
BT_RES: BT1.17 F4.24 | length 1128.1
  Top Layer w5.91: v1(3725.39,5158.46) 3736.22,5169.29 F4.24
  Top Layer w13: BT1.17 v1@2851.38,5146.65
  Bottom Layer w13: v1(2852.36,5147.64) 3714.57,5147.64 v1(3725.39,5158.46)
BTD: D7.2 Q3.6 | length 78.6
  Top Layer w7: D7.2@3024.61,4831.69 D7.2 ; D7.2@3025.59,4832.68 Q3.6
BTMISO: BT1.23 F4.22 | length 1235.4
  Top Layer w5.91: BT1.23 v1@2803.15,5500.98 ; F4.22 3778.54,5245.08 v1(3778.54,5317.91)
  Bottom Layer w13: v1(2808.07,5496.06) 2941.93,5496.06 3072.83,5365.16 3649.61,5365.16 3696.85,5317.91 v1(3778.54,5317.91)
BTMOSI: BT1.24 F4.23 | length 1298.2
  Top Layer w5.91: BT1.24 v1(2808.07,5560.04) ; F4.23 3755.9,5277.51 3744.68,5288.73 3744.68,5331.94 3759.84,5347.1 v1(3759.84,5386.81)
  Bottom Layer w13: v1(2808.07,5560.04) 2993.11,5560.04 3118.11,5435.04 3711.61,5435.04 v1(3759.84,5386.81)
BTSCK: BT1.22 F4.21 | length 1287.3
  Top Layer w5.91: BT1.22 v1@2794.29,5441.93 ; v1(3794.29,5159.45) 3795.27,5160.43 F4.21
  Bottom Layer w13: v1(2807.09,5429.13) 2926.18,5429.13 3120.57,5234.74 3719,5234.74 v1(3794.29,5159.45)
D1D: D1.2 Q1.6 | length 294.9
  Top Layer w7: v1(4502.95,5643.7) 4530.51,5616.14 Q1.6 ; v1(4652.56,5620.08) 4670.28,5620.08 4671.26,5621.06 D1.2
  Bottom Layer w7: v1(4502.95,5643.7) 4650.59,5643.7 4653.54,5640.75 4653.54,5621.06 v1(4652.56,5620.08)
D2D: D2.2 Q1.3 | length 99.4
  Top Layer w7: Q1.3@4610.24,5539.37 D2.2
D3D: D3.2 Q2.6 | length 199.4
  Top Layer w7: Q2.6 4557.09,5437.01 4563.98,5430.12 4611.88,5430.12 4649.28,5467.52 D3.2
D4D: D4.2 Q2.3 | length 99.4
  Top Layer w7: Q2.3@4609.25,5392.72 D4.2
DGND: BT1.1 BT1.3 BT1.4 BT1.7 BT1.8 BT1.9 BT1.11 BT1.12 BT1.13 BT1.14 BT1.15 BT1.18 BT1.19 BT1.20 BT1.25 BT1.28 BT1.29 BT1.30 BT1.31 C1.1 C2.1 C3.1 C4.1 C5.1 C6.1 C7.1 C8.1 C10.1 C14.1 C15.1 C16.1 C19.2 C20.2 C21.1 DGND.1 F4.12 F4.18 F4.63 IR.1 IR.2 P2.4 P2.5 P8.2 Program.3 Q1.1 Q1.4 Q2.1 Q2.4 Q3.1 Q3.4 Q4.1 Q4.4 R4.1 R6.2 R8.2 R10.1 R12.1 R14.1 R16.1 R18.1 R20.1 R22.1 R24.1 R37.1 R38.1 R39.1 R40.1 R41.1 R43.1 R44.1 R45.1 R46.1 R47.2 R48.2 R49.2 R50.2 R51.1 R52.1 R53.1 R54.1 R55.1 R56.1 R57.1 R58.1 R59.1 R60.1 R61.1 | length 10005.5
  Top Layer w5.91: v1(3382.87,4790.35) 3437.01,4790.35 3441.93,4795.28 C2.1 ; R43.1 3573.82,5601.38 3587.6,5615.16 v1(3638.78,5615.16) R44.1@3638.78,5544.29 ; v2@3708.66,5610.24 v2(3709.65,5611.22) 3730.32,5611.22 3743.11,5598.42 3743.11,5592.79 3748.3,5587.6 3753.94,5587.6 3767.72,5573.82 R52.1 ; v2@3822.83,5037.4 v2(3822.83,5038.39) 3869.09,5084.65 F4.12 ; C6.1 3853.35,4693.9 3857.28,4689.96 v1@3943.9,4689.96 ; C6.1@3854.33,4720.47 F4.63 3854.33,4847.44 v2(3874.02,4867.13) ; C5.1 3881.89,5319.88 3854.33,5292.32 F4.18 3854.33,5202.76 3864.17,5192.91 3882.87,5192.91 3912.4,5222.44 3912.4,5252.95 v1@3913.39,5253.94 ; v1(3954.72,4679.13) 4050.2,4774.61 C3.1 ; C7.1 4085.63,5104.33 4169.29,5187.99 4169.29,5229.33 4160.43,5238.19 C8.1 ; v1(4428.15,4447.83) 4429.13,4448.82 4429.13,4500 4446.85,4517.72 Q4.1 ; R22.1 4470.47,5403.55 4470.47,5355.31 4489.17,5336.61 4489.17,5295.28 4488.19,5294.29 4488.19,5202.76 4494.09,5196.85 4531.5,5196.85 C16.1 ; Q4.4 4538.39,4625 4544.29,4630.91 4599.41,4630.91 4606.3,4637.8 4604.33,4639.76 v2(4604.33,4665.35) ; R12.1 4540.35,4662.4 4601.38,4662.4 v2(4604.33,4665.35) ; C14.1 4595.47,4734.25 4607.28,4722.44 4607.28,4668.31 v2(4604.33,4665.35) ; R20.1 4555.12,5321.85 v2(4492.13,5321.85) 4511.81,5341.54 4511.81,5377.95 4525.59,5391.73 Q2.1 ; Q2.4 4609.25,5467.52 4609.25,5500 4614.17,5504.92 v1(4654.53,5504.92) ; v1(4825.79,5785.43) 4825.79,5705.71 C1.1 ; R8.2 5000.98,5032.48 5012.8,5020.67 5012.8,4958.66 v1(5009.84,4955.71)
  Top Layer w7: v1(2911.42,4928.15) 2931.1,4908.46 Q3.4 ; Q3.1 R24.1@3099.41,4983.27 ; v1@3060.04,5059.05 v1@3067.91,5059.05 ; R55.1 3086.61,5059.05 v1@3067.91,5059.05 ; R54.1 3098.43,5128.94 3098.43,5089.57 v1@3067.91,5059.05 ; v1(3379.92,5305.12) 3397.64,5322.83 C4.1 ; C5.1 3878.94,5351.38 3878.94,5404.53 3883.86,5409.45 C20.2 ; R37.1 4027.56,5238.19 4085.63,5296.26 v2(4100.89,5311.52) ; v1(4401.57,5542.32) 4402.56,5543.31 R16.1 4460.63,5541.34 v1(4512.8,5541.34) Q1.1 ; Q1.4 4608.27,5622.05 v2(4670.28,5684.06) ; R18.1 4727.36,5684.06 4748.03,5704.72 C1.1
  Top Layer w9: IR.1 v2(2352.17,4620.87) 2374.02,4642.72 C21.1 ; 2299.21,4006.89 P2.5 ; 2299.21,4038.39 P2.4 ; R14.1@3102.36,4914.37 3140.19,4952.19 3228.77,4952.19 v1(3229.33,4952.76) ; R46.1 3487.21,4354.33 3500.98,4340.55 v2(3548.23,4340.55) v2@3549.21,4339.57 ; R57.1 v2@3549.21,4339.57 ; R58.1 3611.22,4359.25 3616.14,4354.33 3601.38,4339.57 v2@3549.21,4339.57 ; R59.1 3673.23,4357.28 3690.94,4339.57 v2(3735.24,4339.57) ; R60.1 v2(3735.24,4339.57) ; R61.1 3798.23,4407.48 3798.23,4351.38 3786.42,4339.57 v2(3735.24,4339.57) ; R47.2 3859.25,4350.39 3867.13,4342.52 v1@3920.28,4342.52 ; C10.1 3904.53,5683.07 3921.26,5699.8 C19.2 ; R48.2 v1(3921.26,4343.5) 3972.44,4343.5 3983.27,4354.33 R4.1
  Top Layer w13: BT1.14@2165.36,5034.45 BT1.14 v2(2248.03,5028.54) ; BT1.13 2248.03,5087.6 2255.91,5095.47 2255.91,5195.87 2246.06,5205.71 BT1.11 ; BT1.12 v2(2254.92,5146.65) ; BT1.9 2168.31,5326.77 2243.11,5326.77 v2@2243.11,5382.87 ; BT1.8 v2(2242.13,5382.87) 2243.11,5383.86 2243.11,5438.98 2240.16,5441.93 BT1.7 ; BT1.4 2167.32,5617.13 v2(2247.05,5617.13) ; IR.2 2322.24,4670.87 2352.17,4640.94 v2(2352.17,4620.87) ; v2(2562.99,5160.43) 2566.93,5160.43 2612.2,5205.71 BT1.18 ; v1(2596.46,5266.73) 2687.01,5266.73 BT1.19 ; v2(2609.25,5390.75) 2609.25,5347.44 2632.87,5323.82 BT1.20 ; v1(2611.22,5796.26) BT1.28 2728.35,5796.26 ; v2(2621.06,5022.64) 2688.98,5022.64 BT1.15 ; BT1.25 2801.18,5619.09 v1(2809.06,5626.97) ; 2970.47,5205.71 R51.1 ; R53.1@3010.83,5108.27 R53.1 3060.04,5059.05 3070.86,5048.23 R56.1@3134.84,5048.23 ; R24.1@3099.41,4983.27 R24.1 ; R45.1 3708.66,5610.24 3708.66,5659.45 3718.5,5669.29 R39.1 ; R38.1@3830.71,5669.29 3833.66,5666.34 3873.03,5666.34 3904.53,5697.83 v2(3910.43,5697.83) ; R41.1 4037.4,5335.63 4037.4,5374.02 4044.29,5380.91 v1(4044.29,5389.76) ; R49.2 4044.29,4407.48 4044.29,4358.27 4052.17,4350.39 v1(4107.28,4350.39) ; v1@4051.18,5389.76 4066.93,5374.02 R6.2 4116.14,5326.77 v2(4100.89,5311.52) ; C8.1 v2@4085.63,5296.26 ; R50.2 v1(4107.28,4350.39) ; R40.1 4172.24,4407.48 4172.24,4364.17 4158.46,4350.39 v1(4107.28,4350.39) ; v1(4428.15,4447.83) 4485.24,4447.83 R10.1 ; C15.1 4943.9,4955.71 v1(5009.84,4955.71)
  Top Layer w15: BT1.1 2227.36,5796.26 2246.06,5777.56 2246.06,5691.93 2232.28,5678.15 BT1.3 ; IR.1 2251.97,4553.15 2308.07,4497.05 2368.11,4497.05 2392.72,4472.44 DGND.1 2281.5,4388.78 2276.57,4383.86 2276.57,4224.41 2223.43,4171.26 2223.43,4114.17 2299.21,4038.39 ; v3(2256.89,4078.74) 2256.89,4048.23 2298.23,4006.89 ; BT1.31 2368.11,5926.18 2395.67,5898.62 2453.74,5898.62 2486.22,5931.1 BT1.29 ; v1(2427.17,5899.61) BT1.30 ; v1(3140.75,4501.97) 3140.95,4502.17 Program.3
  Top Layer w20: 2298.23,4006.89 2299.21,4006.89
  other v1: 2310.04,4498.03 3062.01,4982.28 3062.01,5051.18 3915.35,5251.97 3882.87,5399.61
  other v2: 4144.69,5160.43 2938.98,5205.71 2247.05,5734.25
IRD: IR_LED.2 Q3.3 | length 65
  Top Layer w5.91: Q3.3@2975.39,4984.25 IR_LED.2
"MCU ON INDICATOR D": D5.2 Q4.6 | length 187.1
  Top Layer w5.91: Q4.6 4487.2,4556.1 4495.08,4548.23 4540.35,4548.23 4582.68,4590.55
  Top Layer w7: 4582.68,4590.55 D5.2
"MCU STANDBY INDICATOR D": D6.2 Q4.3 | length 83.5
  Top Layer w7: Q4.3 4540.35,4515.75 D6.2
NCSB: F4.33 R30.1 | length 507.9
  Top Layer w5.91: R30.1 3211.61,5358.27 3406.5,5163.39 F4.33
NetBT1_6: BT1.6 F4.51 RX.1 | length 2007.3
  Top Layer w5.91: v1(3543.31,4662.4) v1@3543.31,4663.39 ; 3618.11,4738.19 F4.51
  Top Layer w9.84: v1@3543.31,4663.39 3618.11,4738.19
  Top Layer w13: BT1.6 v1@2279.53,5500.98
  Bottom Layer w13: v1(2280.51,5500) 3123.25,4657.26 3538.17,4657.26 v1(3543.31,4662.4) 3543.31,4555.12 RX.1
NetBT1_21: BT1.21 R30.2 | length 335
  Top Layer w5.91: BT1.21 2767.72,5382.87 2792.32,5358.27 R30.2
NetBT1_26: BT1.26 F4.52 TX.1 | length 2501.1
  Top Layer w5.91: 3637.79,4745.08 F4.52
  Top Layer w9.84: v1(3612.2,4661.42) 3637.79,4687.01 3637.79,4745.08
  Top Layer w13: BT1.26 2797.24,5678.15 v1(2810.04,5690.94)
  Bottom Layer w5.91: TX.1 TX.1@3720.47,4553.15
  Bottom Layer w13: v1(2810.04,5690.94) 2814.96,5686.02 2942.91,5686.02 3081.69,5547.24 3673.23,5547.24 3964.57,5255.91 3964.57,5013.78 v1(3612.2,4661.42) TX.1@3720.47,4553.15
NetBT_1: BT.1
NetC9_1: C9.1 F4.31 | length 374.3
  Top Layer w5.91: C9.1 3404.53,5423.23 3418.31,5409.45 3418.31,5381.89 3443.9,5356.3 3549.21,5356.3 3598.42,5307.09 F4.31
NetC9_2: C9.2 F4.47 | length 785.2
  Top Layer w5.91: C9.2 3294.29,5353.35 3316.93,5330.71 3316.93,5288.39 3356.3,5249.02 3477.36,5249.02 3546.26,5180.12 3569.88,5180.12 3569.88,4920.25 3537.43,4887.8 F4.47
NetC10_2: C10.2 F4.14 HIBERNTE.1 R5.1 S1.1 | length 1138
  Top Layer w5.91: 3942.91,5462.6 3941.93,5461.61 3941.93,5444.88 3949.8,5437.01 3949.8,5238.19 3892.72,5181.1 3892.72,5139.76 3908.46,5124.02 F4.14 ; R5.1@4021.65,5635.83 R5.1
  Top Layer w9: 3942.91,5462.6 3942.91,5492.13 3946.85,5496.06 S1.1
  Top Layer w13: C10.2 R5.1 ; R5.1@4021.65,5635.83 S1.1 4092.52,5496.06 4112.2,5515.75 4112.2,5575.79 4145.67,5609.25 4253.94,5609.25 4266.73,5622.05 HIBERNTE.1
NetC17_2: C17.2 C18.2 F1.1 P4.2 P4.4 P4.6 | length 978.6
  Top Layer w20: 3272.64,3332.68 3273.96,3334
  Top Layer w25: F1.1 3134.84,3333.66
  Top Layer w35: 3273.96,3334 C18.2 3417.66,3334 ; 3599.41,3334.65 C17.2@3681,3334.65 ; C17.2@3679.92,3335.73 P4.6 P4.4 P4.2
  Top Layer w50: 3135.83,3332.68 3272.64,3332.68 ; 3417.66,3334 3598.76,3334 3599.41,3334.65
NetD1_1: D1.1 R15.1 | length 59.1
  Top Layer w10: D1.1 R15.1
NetD2_1: D2.1 R17.1 | length 59.1
  Top Layer w10: D2.1 R17.1
NetD3_1: D3.1 R19.1 | length 59.5
  Top Layer w10: D3.1 4768.7,5466.54 R19.1
NetD4_1: D4.1 R21.1 | length 60.4
  Top Layer w10: D4.1 4768.7,5391.73 R21.1
NetD5_1: D5.1 R9.1 | length 74.8
  Top Layer w7: D5.1 R9.1
NetD6_1: D6.1 R11.1 | length 71.9
  Top Layer w7: D6.1 R11.1@4751.97,4515.75
NetD7_1: D7.1 R23.1 | length 59.1
  Top Layer w7: R23.1 D7.1
NetD8_1: D8.1 R36.1 | length 64
  Top Layer w9: D8.1 R36.1
NetF4_2: F4.2 R40.2 | length 632.9
  Top Layer w5.91: F4.2 4018.7,4887.8 4230.31,4676.18 R40.2
NetF4_3: F4.3 Q4.2 R10.2 | length 1104.3
  Top Layer w5.91: F4.3 3953.42,4906.82 4165.03,4906.82 4373.03,4698.82
  Top Layer w7: 4373.03,4698.82 4373.03,4421.26 4387.79,4406.5 4546.26,4406.5 R10.2 4546.26,4479.33 4543.31,4482.28 4516.73,4482.28 4512.79,4486.22 Q4.2
NetF4_4: F4.4 Q4.5 R12.2 | length 736.9
  Top Layer w5.91: F4.4 3953.74,4928.15 4182.09,4928.15 4445.87,4664.37 R12.2 4479.33,4629.92 4483.27,4625.98 4508.86,4625.98 4512.79,4622.05 Q4.5
NetF4_8: F4.8 Q2.2 R20.2 | length 949.4
  Top Layer w5.91: F4.8 3953.94,5007.1 4349.94,5007.1 4390.29,5047.45 ; Q2.2 4582.68,5358.27 4585.63,5355.31 4614.17,5355.31 4616.14,5353.35 R20.2
  Top Layer w10: 4390.29,5047.45 4510.25,5167.4 4555.02,5167.4 4570.87,5183.24
  Top Layer w13: 4570.87,5183.24 4570.87,5231.3 4616.14,5276.58 R20.2
NetF4_9: F4.9 Q2.5 R22.2 | length 988.4
  Top Layer w5.91: F4.9@3953.16,5026 4133.28,5026 4351.38,5244.09 4351.38,5434.06 4383.86,5466.54 R22.2 ; 4479.33,5500 4481.33,5502 4579.72,5502 4582.68,5499.04 Q2.5
  Top Layer w7: R22.2 4474.41,5495.08 4479.33,5500
NetF4_10: F4.10 Q1.2 R16.2 | length 1077.1
  Top Layer w5.91: F4.10 3953.13,5044.91 4117.74,5044.91 4327.76,5254.92 4327.76,5544.29 4385.83,5602.36 R16.2 4459.64,5601.38 4507.87,5601.38 4525.59,5583.66 4576.77,5583.66 4582.68,5577.76 Q1.2
NetF4_11: F4.11 Q1.5 R18.2 | length 1119.5
  Top Layer w5.91: F4.11 3953.9,5063.81 4100.23,5063.81 4304.13,5267.72 4304.13,5555.12 4433.07,5684.06 4488.19,5684.06 ; R18.2 4549.21,5651.57 4553.15,5647.64 4579.72,5647.64 4582.68,5644.69 Q1.5
  Top Layer w13: 4488.19,5684.06 R18.2
NetF4_15: F4.15 R41.2 | length 250.8
  Top Layer w5.91: F4.15 3914.37,5143.7 3904.53,5153.54 3904.53,5174.21 3977.36,5247.05 R41.2@3977.36,5321.85
NetF4_16: F4.16 R37.2 | length 75.4
  Top Layer w5.91: F4.16 3976.38,5163.39 3992.13,5179.13 R37.2
NetF4_17: F4.17 R38.2 | length 444.1
  Top Layer w5.91: R38.2@3832.68,5606.3 3832.68,5548.23 3845.47,5535.43 3895.67,5535.43 3914.37,5516.73 3914.37,5307.09 3874.01,5266.73 F4.17
NetF4_20: F4.20 R39.2 | length 386.9
  Top Layer w5.91: R39.2 3814.96,5564.96 F4.20
NetF4_25: F4.25 R52.2 | length 262.3
  Top Layer w5.91: F4.25 3716.53,5402.56 3767.72,5453.74 R52.2
NetF4_26: F4.26 R45.2 | length 246
  Top Layer w5.91: F4.26 3696.85,5405.51 3708.66,5417.32 R45.2
NetF4_27: F4.27 R44.2 | length 257.6
  Top Layer w5.91: R44.2 3639.76,5436.02 3677.16,5398.62 F4.27
NetF4_28: F4.28 R43.2 | length 276.6
  Top Layer w5.91: R43.2 3572.83,5482.28 3572.83,5420.28 3657.48,5335.63 F4.28
NetF4_29: F4.29 R28.1 | length 294.7
  Top Layer w5.91: F4.29 3637.79,5322.84
  Top Layer w9.84: R28.1 3508.44,5452.19 3637.79,5322.84
NetF4_30: F4.30 R29.1 | length 346.9
  Top Layer w5.91: F4.30 3618.11,5312.99
  Top Layer w9.84: R29.1 3444.88,5428.15 3474.41,5398.62 3532.48,5398.62 3618.11,5312.99
NetF4_36: F4.36 R51.2 | length 549.3
  Top Layer w5.91: R51.2 3069.88,5202.76 3091.54,5224.41 3236.22,5224.41 3247.05,5213.58 3247.05,5174.21 3316.93,5104.33 F4.36
NetF4_37: F4.37 R53.2 | length 568.3
  Top Layer w5.91: R53.2 3070.87,5136.81 3072.83,5138.78 3087.33,5138.78 3092.52,5143.97 3092.52,5170.28 3127.95,5205.71 3217.52,5205.71 3229.33,5193.9 3229.33,5167.32 3312.01,5084.65 F4.37
NetF4_38: F4.38 R54.2 | length 347.7
  Top Layer w5.91: R54.2 3294.29,5064.96 F4.38
NetF4_39: F4.39 R55.2 | length 332.4
  Top Layer w5.91: R55.2 3222.44,5106.3 3283.46,5045.28 F4.39
NetF4_40: F4.40 R56.2 | length 316.1
  Top Layer w5.91: R56.2 3256.89,5047.24 3278.54,5025.59 F4.40
NetF4_41: F4.41 Q3.2 R24.2 | length 580.9
  Top Layer w5.91: Q3.2 3000,5018.7 3001.97,5020.67 3150.59,5020.67 3161.42,5009.84 R24.2 ; 3219.49,5005.91 F4.41
  Top Layer w7: R24.2 3193.9,4980.32 3219.49,5005.91
NetF4_42: F4.42 Q3.5 R14.2 | length 662.3
  Top Layer w5.91: Q3.5 3000,4944.88 3005.91,4950.79 3058.07,4950.79 3069.88,4938.98 3069.88,4921.26 3069.88,4885.83 3077.76,4877.95 3156.5,4877.95 3162.4,4883.86 R14.2 3279.53,4913.39 3352.36,4986.22 F4.42
NetF4_43: F4.43 IR.4 IROUT.1 | length 1607.9
  Top Layer w5.91: 3361.22,4966.54 F4.43
  Top Layer w9.84: IR.4 3136.02,4770.87 3187.99,4822.83 3217.52,4822.83 3361.22,4966.54
  Top Layer w13: IR.4 2251.97,4832.68 2326.77,4907.48 IROUT.1
NetF4_44: F4.44 R1.1 | length 1649.5
  Top Layer w5.91: 3374.02,4946.85 3422.24,4946.85 F4.44
  Top Layer w9.84: 2898.62,4084.64 2919.09,4105.11 2919.09,4678.11 2975.44,4734.46 3133.74,4734.46 3200.87,4801.59 3228.76,4801.59 3374.02,4946.85
  Top Layer w13: R1.1 2898.62,4084.64
NetF4_45: F4.45 R2.1 | length 1681.8
  Top Layer w5.91: 3208.7,4782.69 3208.91,4782.48 3236.22,4782.48 3380.91,4927.17 F4.45
  Top Layer w9.84: 2896.65,4028.54 2937.99,4069.88 2937.99,4670.28 2983.27,4715.55 3141.57,4715.55 3208.7,4782.69
  Top Layer w13: R2.1 2896.65,4028.54
NetF4_46: F4.46 Program.4 SWDIO.1 | length 820.3
  Top Layer w5.91: 3433.14,4908.46 3499.02,4908.46 F4.46
  Top Layer w9.84: 3192.91,4740.16 3216.54,4763.78 3245.08,4763.78 3390.75,4909.45 3432.15,4909.45 3433.14,4908.46
  Top Layer w13: SWDIO.1 3067.91,4567.91 3213.78,4567.91 Program.4 3199.01,4602.17 3192.91,4608.27 3192.91,4740.16
NetF4_49: F4.49 Program.2 SWCLK.1 | length 904.2
  Top Layer w5.91: 3578.74,4750 F4.49
  Top Layer w9.84: 3441.93,4418.31 3441.93,4667.48 3441.93,4701.77 3490.16,4750 3578.74,4750
  Top Layer w13: SWCLK.1 3025.98,4402.17 Program.2 3425.79,4402.17 3441.93,4418.31
NetF4_50: F4.50 R46.2 | length 396.2
  Top Layer w5.91: 3487.21,4686.02 3515.75,4714.57 3563.98,4714.57 3598.42,4749.02 F4.50
  Top Layer w9.84: R46.2 3487.21,4686.02
NetF4_53: F4.53 R57.2 | length 366.7
  Top Layer w5.91: R57.2 3549.21,4480.32 3657.48,4588.58 F4.53
NetF4_54: F4.54 R58.2 | length 349.2
  Top Layer w5.91: R58.2 3611.22,4508.86 3677.16,4574.8 F4.54
NetF4_55: F4.55 R59.2 | length 331.6
  Top Layer w5.91: R59.2 3673.23,4501.97 3696.85,4525.59 F4.55
NetF4_56: F4.56 R60.2 | length 329.6
  Top Layer w5.91: F4.56 3716.53,4522.64 3735.24,4503.94 R60.2
NetF4_57: F4.57 R61.2 | length 347.1
  Top Layer w5.91: F4.57 3736.22,4578.74 3797.24,4517.72 R61.2
NetF4_58: F4.58 R47.1 | length 364.7
  Top Layer w5.91: F4.58 3755.9,4621.06 3859.25,4517.72 R47.1
NetF4_59: F4.59 R48.1 | length 382.2
  Top Layer w5.91: F4.59 3775.59,4657.48 3921.26,4511.81 R48.1
NetF4_61: F4.61 R49.1 | length 445.5
  Top Layer w5.91: F4.61 3814.96,4680.12 3959.65,4535.43 4007.87,4535.43 4045.28,4498.03 R49.1
NetF4_62: F4.62 R50.1 | length 490
  Top Layer w5.91: F4.62 3832.68,4787.4 3832.68,4688.98 3852.36,4669.29 3900.59,4669.29 4048.23,4521.65 4091.54,4521.65 4107.28,4505.91 R50.1
"NetI2C Camera_1": "I2C Camera.1" "I2C Motor.1" R27.2 R29.2 SDA.1 | length 1321.7
  Top Layer w9.84: R29.2 R27.2 3444.88,5747.05 3682.09,5984.25 SDA.1 ; SDA.1@3806.1,5983.27 4097.44,5983.27 4464.57,5983.27
"NetI2C Camera_2": "I2C Camera.2" "I2C Motor.2" R26.1 R28.2 SCL.1 | length 1443.4
  Top Layer w5.91: SCL.1@4722.05,5883.27 SCL.1
  Top Layer w9.84: 4097.44,5883.27 4464.57,5883.27 SCL.1@4722.05,5883.27
  Top Layer w13: R28.2 3508.44,5608.83 3658.47,5758.86 R26.1 3881.89,5842.52 3922.64,5883.27 4097.44,5883.27
NetIR_3: IR.3 R34.2 VS.1 | length 511.4
  Top Layer w13: IR.3@2252.36,4720.47 R34.2
  Top Layer w15: VS.1 2169.29,4700.79 2189.37,4720.87 IR.3 IR.3@2252.36,4720.47
NetIR_LED_1: IR_LED.1 R13.1 | length 58.1
  Top Layer w7: R13.1 IR_LED.1
NetP1_2: P1.2 P4.1 R36.2 VBAT.1 | length 1059.3
  Top Layer w13: VBAT.1 R36.2 4286.02,3244.09 P1.2@4307.09,3223.03
  Top Layer w40: P4.1 4102.36,3582.68 4308.07,3376.97 4308.07,3224.01 P1.2@4307.09,3223.03
NetP2_1: P2.1 P4.3 USB5V.1 | length 1841.3
  Top Layer w9: P2.1 2480.32,4132.88 v1(2500.98,4153.54) ; P4.3@3778.54,3584.06 P4.3
  Top Layer w30: P4.3@3778.54,3584.06 v1(3778.54,3674.21)
  Bottom Layer w13: USB5V.1 2550.2,4202.76 v1(2500.98,4153.54) 2980.32,3674.21 v1(3778.54,3674.21)
NetP2_2: P2.2 R1.2 | length 126
  Top Layer w9: P2.2 2467.52,4101.38
  Top Layer w10: 2467.52,4101.38 R1.2
NetP2_3: P2.3 R2.2 | length 135.2
  Top Layer w9: P2.3 2441.93,4069.88
  Top Layer w10: 2441.93,4069.88 R2.2
NetP5_2: P5.2 R3.1 | length 87
  Top Layer w13: P5.2 R3.1@4303.15,4257.87
NetR6_1: R6.1 S1.2 | length 118.1
  Top Layer w13: R6.1@4179.13,5377.95 S1.2
NetR8_1: R8.1 S2.2 | length 167.4
  Top Layer w13: S2.2 4921.26,5142.72 4942.91,5121.06 R8.1
NRST: C16.2 F4.7 NRST.1 Program.5 R7.1 S2.1 | length 2185.5
  Top Layer w5.91: 3397.05,4702.17 3538.39,4843.5 3753.94,4843.5 3896.65,4986.22 F4.7 3954.72,4988.19 4459.65,4988.19 4500,5028.54
  Top Layer w7: C16.2 4534.45,5142.72 S2.1 S2.1@4659.45,5139.76
  Top Layer w13: Program.5 3397.05,4702.17 ; 4500,5028.54 4532.48,5061.02 C16.2 ; S2.1@4659.45,5145.67 4659.45,5250 4692.91,5283.47 R7.1 4827.76,5239.17 4835.63,5231.3 NRST.1
PH0_OSC: C14.2 F4.5 Y1.1 | length 697.6
  Top Layer w5.91: F4.5 3997.05,4946.85
  Top Layer w9.84: 3997.05,4946.85 4220.24,4946.85 4275.35,4891.73
  Top Layer w10: Y1.1 4414.37,4881.89 4414.37,4747.05 4427.16,4734.25 C14.2
  Top Layer w15: 4275.35,4891.73 Y1.1
PH1_OSC: C15.2 F4.6 Y1.2 | length 1060.7
  Top Layer w5.91: F4.6 3999.02,4966.54 ; Y1.2 4786.42,4899.61 C15.2
  Top Layer w13: 3999.02,4966.54 4765.75,4966.54
  Top Layer w15: 4765.75,4966.54 4778.54,4953.74 Y1.2
UART_CTS: BT1.10 F4.35 | length 1409.3
  Top Layer w5.91: 3459.65,5124.02 F4.35
  Top Layer w9.84: BT1.10 2234.25,5264.76 2262.8,5236.22 2782.48,5236.22 2802.17,5255.91 3244.09,5255.91 3375.98,5124.02 3459.65,5124.02
UART_RTS: BT1.5 F4.34 | length 1508.7
  Top Layer w5.91: 3457.68,5143.7 F4.34
  Top Layer w9.84: BT1.5 2305.12,5560.04 2567.91,5297.24 2717.7,5297.24 2719.67,5299.21 3236.22,5299.21 3391.73,5143.7 3457.68,5143.7
VIN: C11.1 F1.2 REG.1 | length 441.9
  Top Layer w13: 2788.38,3488.19 C11.1@2788.38,3556.1
  Top Layer w18: 2788.38,3488.19 2809.06,3467.52 2808.07,3466.54 REG.1
  Top Layer w25: 2809.06,3467.52 2830.71,3489.17 2885.83,3489.17 2935.04,3439.96 F1.2
pads on no net: BT1.27 MT1.1 MT2.1 MT3.1 P2.6 P2.7 P2.8 P2.9 P2.MH1 P2.MH2 P4.5

## Polygon pours and split planes (outlines as drawn)
3V3 on Internal Plane 1 (split plane): 5326.36,3020.1 2020.1,3020.1 2020.1,6129.51 5326.36,6129.51
DGND on Internal Plane 2 (split plane): 4602.19,3020.1 2413.56,3020.1 2413.56,3698.68 2557.23,3842.34 4602.19,3842.34
DGND on Internal Plane 2 (split plane): 5326.36,3020.1 4612.38,3020.1 4612.38,3841.55 4612.86,3841.87 4613.96,3843.52 4614.35,3845.47 4613.96,3847.42 4612.86,3849.08 4610.89,3851.05 4609.23,3852.15 4607.28,3852.54 2555.12,3852.54 2553.17,3852.15 2551.51,3851.05 2404.86,3704.39 2403.75,3702.74 2403.37,3700.79 2403.37,3020.1 2020.1,3020.1 2020.1,6129.51 5326.36,6129.51

## Keep-outs
Keep-Out Layer:
  lines w11.81: 2051.18,3051.18 5295.28,3051.18 5295.28,6098.43 2051.18,6098.43 2051.18,3051.18

## Other copper
Internal Plane 2 (plane layer: these items are gaps in the copper):
  lines w10: 2408.46,3018.7 2408.46,3700.79 2555.12,3847.44 4607.28,3847.44 ; 4607.28,3003.94 4607.28,3847.44 ; 4609.25,3845.47 4607.28,3847.44

## Silkscreen, mask and mechanical layers (free items; w line width, h text height)
Drill Drawing:
  text ".LEGEND" at 1527.27,7284.42 h60
  text "Drill Drawing." at 1527.27,7184.42 h60

## Dimensions
2051.18,3051.18 to 5295.28,3051.18 on Mechanical 1
2051.18,3051.18 to 2051.18,6098.43 on Mechanical 1

## Text inside footprints (layer, text, board x,y; h text height)
BT1: Top Overlay "Do not place copper" at 1464.57,5461.61 h60 r90; Top Overlay "or any metal within" at 1582.68,5479.33 h60 r90; Top Overlay "this keepout area" at 1728.35,5623.03 h60 r90
"I2C Camera": Top Overlay "1" at 4302.11,5966.95 h60
"I2C Motor": Top Overlay "1" at 3934.98,5966.95 h60
P1: Top Overlay "1" at 4470.53,3148.21 h60 r180
P2: Mechanical 1 "PCB Edge" at 2039.09,4228.8 h9.84 r270
P4: Top Overlay "1" at 3959.92,3602.68 h50 r180; Top Overlay "2" at 3979.92,3502.68 h50 r180; Top Overlay "5" at 3619.92,3602.68 h50 r180; Top Overlay "6" at 3619.92,3502.68 h50 r180
Program: Top Overlay "1" at 3423.03,4327.17 h60 r180